# EAGLE board Task1_electric (EAGLE 7.6.0)

Size 56.82 x 53.33 mm. Coordinates in mm from the lower left corner, seen from the top.
Outline: 0,0 56.82,0 56.82,53.33 0,53.33 0,0
Copper layers (1*16): Top 0.035mm / dielectric 1.5mm / Bottom 0.035mm
Design rules "default": minimum track width 10mil, minimum drill 24mil, track to track 8mil, track to pad 8mil, pad to pad 8mil, via to via 8mil, smd to smd 8mil, copper to edge 40mil, drill to drill 8mil, minimum pad ring 10mil, minimum via ring 8mil, stop-mask expansion 4mil, vias tented up to drill 0mil, thermal gap 10mil

## Footprints (pad centres in the part's own frame; a part is rotated, then mirrored left to right if it is on the bottom)
DC-POWER = drill 0.889 pad 2.54 octagon: + 0,2.54; - 0,-2.54
C5B2.5 = drill 0.813 pad 1.6 octagon: 1 -2.54,0; 2 2.54,0
LED5MM = drill 0.813 octagon: A -1.27,0; K 1.27,0
D-7.5 = drill 0.813 long: A 3.81,0; C -3.81,0
0207/10 = drill 0.813 octagon: 1 -5.08,0; 2 5.08,0
DIL08 = drill 0.813 pad 1.27: 1 -3.81,-3.81; 2 -1.27,-3.81; 3 1.27,-3.81; 4 3.81,-3.81; 5 3.81,3.81; 6 1.27,3.81; 7 -1.27,3.81; 8 -3.81,3.81

## Placement (x,y rotation side)
BAT1  [DC-POWER]  5,48.18 0 top
C1  2uF  [C5B2.5]  5,60.88 0 top  (outside the outline)
D1  [LED5MM]  5,98.98 0 top  (outside the outline)
D2do  [D-7.5]  5,73.58 0 top  (outside the outline)
R1  1M‎Ω  [0207/10]  5,22.78 0 top
R2  1M‎Ω  [0207/10]  5,35.48 0 top
R3  1k‎Ω  [0207/10]  5,86.28 0 top  (outside the outline)
U1  [DIL08]  5,10.08 0 top

## Library data of the parts
BAT1 C1 D1 D2do R1-R3 U1 = AUTODESK_CIRCUITS_BREADBOARD

## Nets
N$1: U1.5
N$2: D1.A U1.3
N$3: BAT1.- C1.1 R3.1 U1.1
N$4: BAT1.+ R1.1 U1.4 U1.8
N$5: D1.K R3.2
N$6: D2do.A R1.2 R2.1 U1.7
N$7: C1.2 D2do.C R2.2 U1.2 U1.6

## Tracks (layer width: path | path; a pad name or v marks a point on that pad's centre or on a via)
N$2  (1 unrouted)
N$3  (3 unrouted)
N$4  (3 unrouted)
N$5  (1 unrouted)
N$6  (3 unrouted)
N$7  (4 unrouted)